# Allegro board beeSafe_1V3.brd
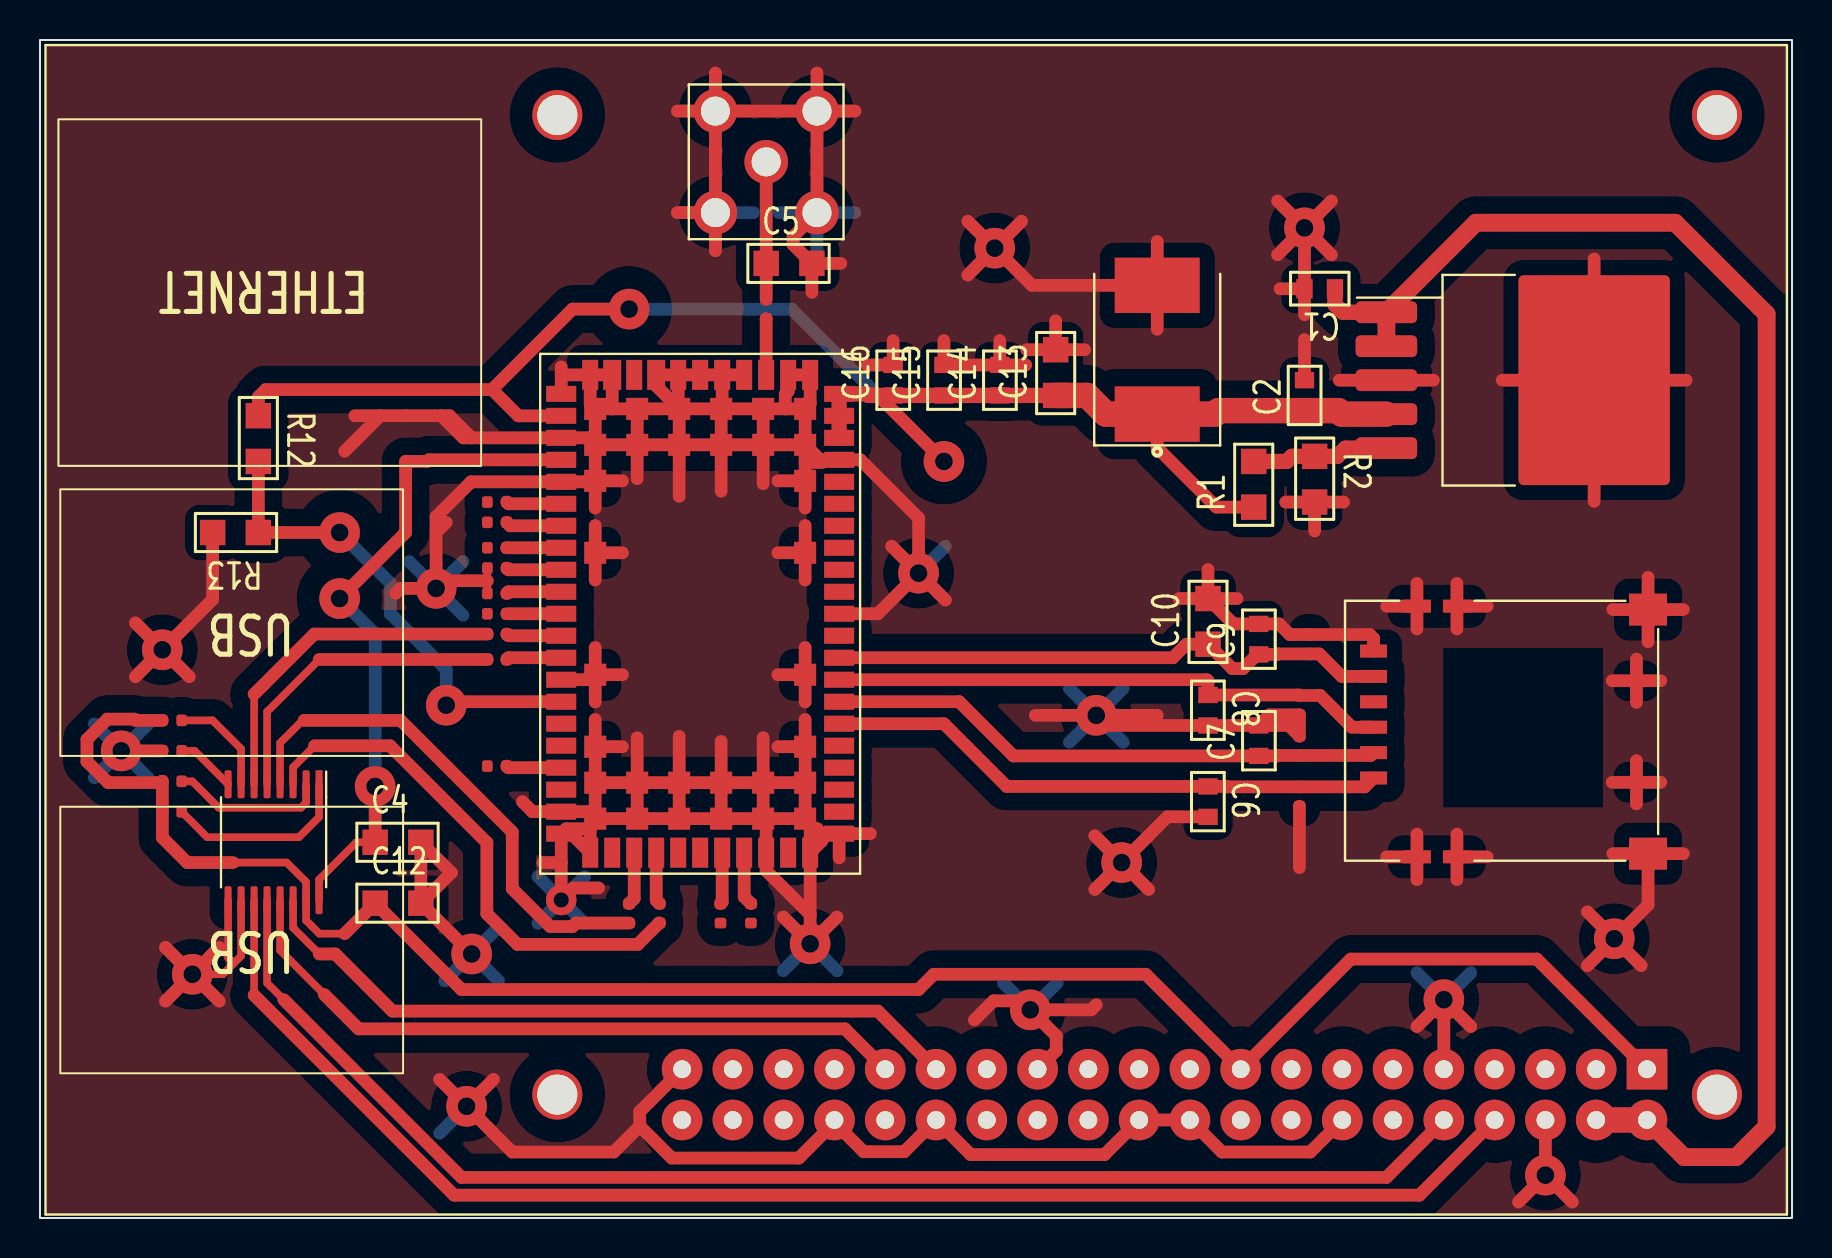
[diagram p0: board, top side]
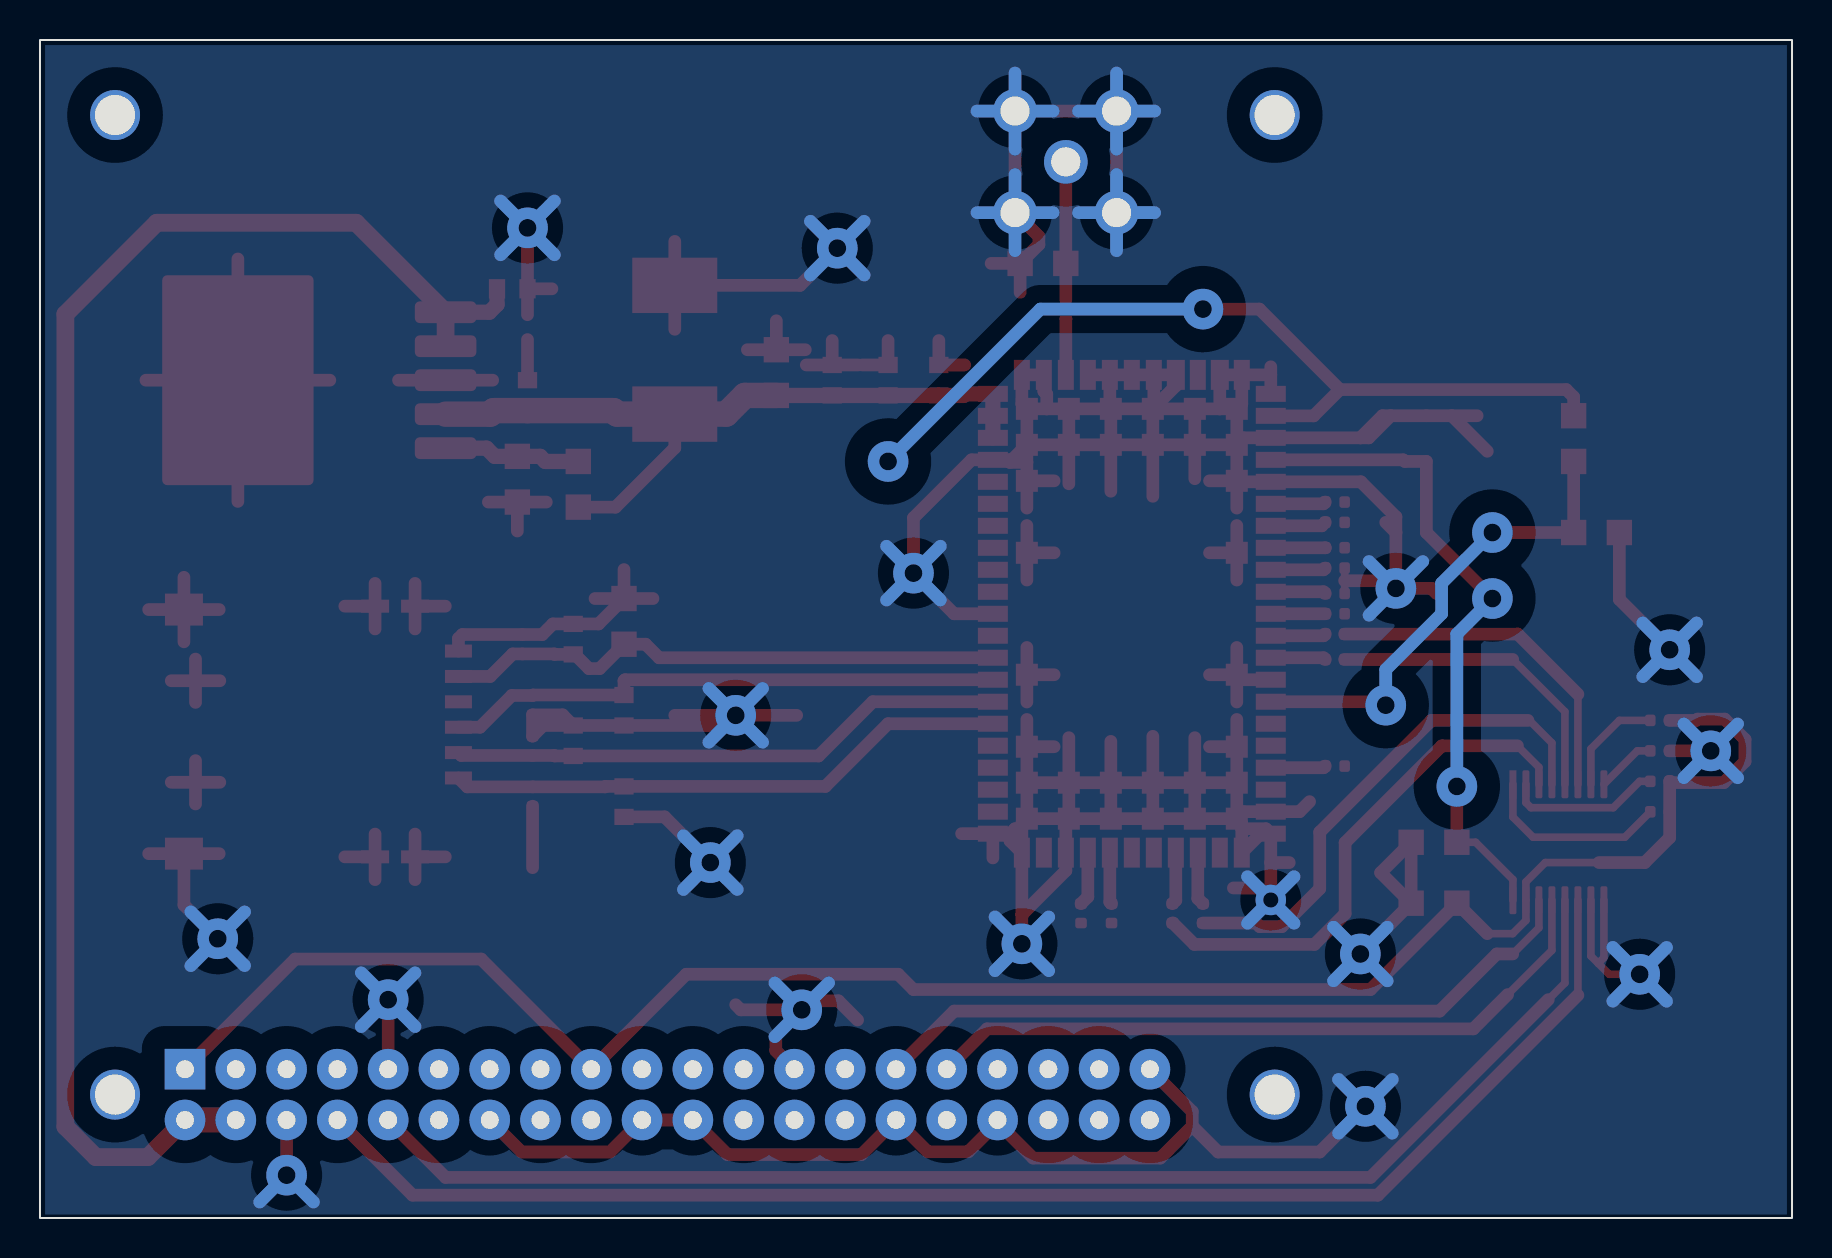
[diagram p1: board, bottom side, seen from below]

Outline 87.63 x 58.93 mm; copper layers: TOP, BOTTOM. Coordinates in mm from the lower left corner of the outline.
Outline path: rectangle 0,0 87.63,58.93

## Design rules (mm)
constraint set DEFAULT: min track width 0.635

## Placement (name value [footprint] x y rotation side)
C1  10u  [GU-C0603]  64.77 46.48 180 top
C2  10u  [GU-C0603]  63.25 40.39 90 top
C4  100n  [GU-C0805]  16.76 18.8 0 top
C5  NC  [GU-C0805]  36.32 47.75 0 top
C6  47p  [GU-C0603]  58.42 21.59 270 top
C7  47p  [GU-C0603]  60.96 23.11 90 top
C8  47p  [GU-C0603]  58.42 26.16 270 top
C9  47p  [GU-C0603]  60.96 28.19 90 top
C10  100n  [GU-C0805]  58.42 28.7 90 top
C12  100n  [GU-C0805]  16.76 15.75 0 top
C13  100n  [GU-C0805]  50.8 41.15 90 top
C14  10n  [GU-C0603]  48.01 41.15 90 top
C15  15p  [GU-C0603]  45.21 41.15 90 top
C16  56p  [GU-C0603]  42.67 41.15 90 top
C17  300u  [GU-C2917]  55.88 43.43 90 top
D2  ESD  [GU-R0402]  63.5 28.7 90 top
D3  ESD  [GU-R0402]  62.99 25.65 270 top
D4  ESD  [GU-R0402]  62.99 23.62 90 top
D5  ESD  [GU-R0402]  62.99 21.08 270 top
J2  SMA_ANT  [GU_SMA_JACK_STR]  36.32 52.83 0 top
J3  SIM_CON  [JAE_SJ115712]  81.28 17.53 90 top
R1  9.1k  [GU-R0805]  60.71 35.56 90 top
R2  3.9k  [GU-R0805]  63.75 38.1 270 top
R3  0  [GU-R0402]  22.86 32.51 0 top
R4  0  [GU-R0402]  22.86 31.24 0 top
R5  0  [GU-R0402]  22.86 30.23 0 top
R6  0  [GU-R0402]  22.86 29.21 0 top
R7  0  [GU-R0402]  22.86 27.94 0 top
R8  0  [GU-R0402]  34.04 15.24 90 top
R9  0  [GU-R0402]  35.56 15.24 90 top
R10  0  [GU-R0402]  29.46 15.24 90 top
R11  0  [GU-R0402]  30.99 15.24 90 top
R12  100k  [GU-R0805]  10.92 40.13 270 top
R13  NC  [GU-R0805]  10.92 34.29 180 top
R14  0  [GU-R0402]  22.86 22.61 0 top
R15  0  [GU-R0402]  36.32 45.47 90 top
R16  0  [GU-R0402]  22.86 33.53 0 top
R17  0  [GU-R0402]  22.86 34.8 0 top
R18  0  [GU-R0402]  22.86 35.81 0 top
R19  0  [GU-R0402]  6.6 20.32 0 top
R20  0  [GU-R0402]  6.6 21.84 0 top
R21  0  [GU-R0402]  6.6 24.89 0 top
R22  0  [GU-R0402]  6.6 23.37 0 top
U1  LT1764AEQ  [DPAK6P170_1404X457L127X83T61-1]  73.66 41.91 270 top
U2  SARA-G3  [UBLOX_SARA-G350-02X-01]  33.02 30.23 270 top
U3  SN74AVC4T774PW  [SOP16P65_500X640X108L60X24]  11.68 18.8 180 top
U4  Raspberry Pi B+  [GU-RASP-PI-3]  87.38 58.67 180 top

## Library data of the parts
C1 C2 C4 C12-C16 = CAP NP
C5-C10 = SMALL CAP
C17 = CAP POL
D2-D5 = ESD
J2 = SMA_ANT
J3 = SIM_CON_0
R1-R14 R16-R18 = R
R15 R19-R22 = SMALL R1
U1 = LT1764AEQ
U2 = SARA-G3
U3 = SN74AVC4T774
U4 = Raspberry Pi B+_2

## Footprints (pads in the part's own frame, mm; a bottom-side part is the same pattern mirrored in y, then rotated)
DPAK6P170_1404X457L127X83T61-1
  rrect 1.09x3.08 smd: 1(-3.4,-6.317) 2(-1.7,-6.317) 3(0,-6.317) 4(1.7,-6.317) 5(3.4,-6.317)
  rrect 10.5x7.57 smd: 6(0,4.072)
GU-C0603
  rect 0.813x0.965 smd: 1(0,0) 2(1.524,0)
GU-C0805
  rect 1.27x1.27 smd: 1(0,0) 2(2.286,0)
GU-C2917
  rect 2.77x4.25 smd: 1(-3.22,0) 2(3.22,0)
GU-R0402
  rrect 0.53x0.58 smd: 1(-0.485,0) 2(0.485,0)
GU-R0805
  rect 1.27x1.27 smd: 1(0,0) 2(2.286,0)
GU-RASP-PI-3
  round 2.5 hole 2 unplated: (3.5,52.5) (3.5,3.5) (61.5,52.5) (61.5,3.5)
  rect 2.032x2.032 hole 0.889: 1(7,51.23)
  round 2.032 hole 0.889: 2(7,53.77) 3(9.54,51.23) 4(9.54,53.77) 5(12.08,51.23) 6(12.08,53.77) 7(14.62,51.23) 8(14.62,53.77) 9(17.16,51.23) 10(17.16,53.77) 11(19.7,51.23) 12(19.7,53.77) 13(22.24,51.23) 14(22.24,53.77) 15(24.78,51.23) 16(24.78,53.77) 17(27.32,51.23) 18(27.32,53.77) 19(29.86,51.23) 20(29.86,53.77) 21(32.4,51.23) 22(32.4,53.77) 23(34.94,51.23) 24(34.94,53.77) 25(37.48,51.23) 26(37.48,53.77) 27(40.02,51.23) 28(40.02,53.77) 29(42.56,51.23) 30(42.56,53.77) 31(45.1,51.23) 32(45.1,53.77) 33(47.64,51.23) 34(47.64,53.77) 35(50.18,51.23) 36(50.18,53.77) 37(52.72,51.23) 38(52.72,53.77) 39(55.26,51.23) 40(55.26,53.77)
GU_SMA_JACK_STR
  round 2.18 hole 1.45: 1(0,0) 2(-2.54,2.54) 3(2.54,2.54) 4(2.54,-2.54) 5(-2.54,-2.54)
JAE_SJ115712
  rect 0.65x1.35 smd: 1(10.835,14.58) 2(9.565,14.58) 3(8.295,14.58) 4(7.025,14.58) 5(5.755,14.58) 6(4.485,14.58)
  rect 0.65x1.4 smd: 7(0.54,10.41) 8(0.54,12.41) 13(13.08,12.41) 14(13.08,10.41)
  rect 1.6x1.9 smd: 9(0.7,0.85) 12(12.91,0.85)
  rect 0.54x0.8 smd: 10(4.27,1.43) 11(9.35,1.43)
SOP16P65_500X640X108L60X24
  rect 0.35x1.4 smd: 1(-2.275,-2.9)
  rrect 0.35x1.4 smd: 2(-1.625,-2.9) 3(-0.975,-2.9) 4(-0.325,-2.9) 5(0.325,-2.9) 6(0.975,-2.9) 7(1.625,-2.9) 8(2.275,-2.9) 9(2.275,2.9) 10(1.625,2.9) 11(0.975,2.9) 12(0.325,2.9) 13(-0.325,2.9) 14(-0.975,2.9) 15(-1.625,2.9) 16(-2.275,2.9)
UBLOX_SARA-G350-02X-01
  rect 0.8x1.5 smd: 1(-11,-6.95) 2(-9.9,-6.95) 3(-8.8,-6.95) 4(-7.7,-6.95) 5(-6.6,-6.95) 6(-5.5,-6.95) 7(-4.4,-6.95) 8(-3.3,-6.95) 9(-2.2,-6.95) 10(-1.1,-6.95) 11(0,-6.95) 12(1.1,-6.95) 13(2.2,-6.95) 14(3.3,-6.95) 15(4.4,-6.95) 16(5.5,-6.95) 17(6.6,-6.95) 18(7.7,-6.95) 19(8.8,-6.95) 20(9.9,-6.95) 21(11,-6.95) 33(11,6.95) 34(9.9,6.95) 35(8.8,6.95) 36(7.7,6.95) 37(6.6,6.95) 38(5.5,6.95) 39(4.4,6.95) 40(3.3,6.95) 41(2.2,6.95) 42(1.1,6.95) 43(0,6.95) 44(-1.1,6.95) 45(-2.2,6.95) 46(-3.3,6.95) 47(-4.4,6.95) 48(-5.5,6.95) 49(-6.6,6.95) 50(-7.7,6.95) 51(-8.8,6.95) 52(-9.9,6.95) 53(-11,6.95)
  rect 1.5x0.8 smd: 22(11.95,-5.5) 23(11.95,-4.4) 24(11.95,-3.3) 25(11.95,-2.2) 26(11.95,-1.1) 27(11.95,0) 28(11.95,1.1) 29(11.95,2.2) 30(11.95,3.3) 31(11.95,4.4) 32(11.95,5.5) 54(-11.95,5.5) 55(-11.95,4.4) 56(-11.95,3.3) 57(-11.95,2.2) 58(-11.95,1.1) 59(-11.95,0) 60(-11.95,-1.1) 62(-11.95,-3.3) 64(-11.95,-5.5)
  rect 1.5x0.9 smd: 61(-11.95,-2.2) 63(-11.95,-4.4)
  rect 1.1x1.1 smd: 65(-10.25,-5.25) 66(-10.25,-3.15) 67(-10.25,-1.05) 68(-10.25,1.05) 69(-10.25,3.15) 70(-10.25,5.25) 71(-8.45,-5.25) 72(-8.45,-3.15) 73(-8.45,-1.05) 74(-8.45,1.05) 75(-8.45,3.15) 76(-8.45,5.25) 77(-6.65,-5.25) 78(-6.65,5.25) 79(-3.05,-5.25) 80(-3.05,5.25) 81(3.05,-5.25) 82(3.05,5.25) 83(6.65,-5.25) 84(6.65,5.25) 85(8.45,-5.25) 86(8.45,-3.15) 87(8.45,-1.05) 88(8.45,1.05) 89(8.45,3.15) 90(8.45,5.25) 91(10.25,-5.25) 92(10.25,-3.15) 93(10.25,-1.05) 94(10.25,1.05) 95(10.25,3.15) 96(10.25,5.25)

## Nets
3V8: C2.1 C13.1 C14.1 C15.1 C16.1 C17.1 R1.1 R12.1 U1.4 U2.2 U2.51 U2.52 U2.53
5V: C1.1 U1.1 U1.2 U4.2 U4.4(P5V#4)
GND: C1.2 C2.2 C4.2 C5.2 C6.2 C7.2 C8.2 C9.2 C10.2 C12.2 C13.2 C14.2 C15.2 C16.2 C17.2 D2.2 D3.2 D4.2 D5.2 J2.2 J2.3 J2.4 J2.5(GND4) J3.1 J3.7 J3.8 J3.9 J3.10 J3.11 J3.12 J3.13 J3.14 R2.2 R3.1 R4.1 R13.2 R22.1 U1.3 U1.6 U2.1 U2.3 U2.5 U2.14 U2.20 U2.21 U2.22 U2.30 U2.32 U2.33 U2.43 U2.50 U2.54 U2.55 U2.57 U2.58 U2.59 U2.60 U2.61 U2.63 U2.64 U2.65 U2.66 U2.67 U2.68 U2.69 U2.70 U2.71 U2.72 U2.73 U2.74 U2.75 U2.76 U2.77 U2.78 U2.79 U2.80 U2.81 U2.82 U2.83 U2.84 U2.85 U2.86 U2.87 U2.88 U2.89 U2.90 U2.91 U2.92 U2.93 U2.94 U2.95 U2.96 U3.9(~OE) U3.10 U4.6 U4.9 U4.14 U4.20 U4.22 U4.25 U4.30 U4.34 U4.39
PI_GPIO5: U3.14 U4.29
PI_GPIO6: U3.13 U4.31
PI_RX: U3.12 U4.10
PI_TX: U3.11 U4.8
PWR_ON: R12.2 R13.1 U2.15
SARA_GPIO3: R10.1 U3.4
SARA_GPIO4: R11.1 U3.3
SARA_RX: R7.1 U3.5
SARA_TX: R6.1 U3.6
SIM_CLK: C6.1 D5.1(2) J3.6 U2.38
SIM_IO: C7.1 D4.1(2) J3.5 U2.39
SIM_RST: C8.1 D3.1(2) J3.4 U2.40
V_INT: C4.1 U2.4(V_INT) U3.16
V_PI: C12.1 R19.1 R20.1 R21.1 U3.15 U4.1 U4.17
VSIM: C9.1 C10.1 D2.1(2) J3.2 U2.41
N24064: R15.1 U2.56
N24073: C5.1 J2.1 R15.2
N39174: R1.2 R2.1 U1.5(SENSE)
N664261: R3.2 U2.9
N664661: R7.2 U2.13
N664861: R16.2 U2.8
N665261: R14.2 U2.18
N665461: R5.2 U2.11
N665861: R17.2 U2.7
N666061: R19.2 U3.1
N666461: R10.2 U2.24
N666661: R8.2 U2.28
N667709: R20.2 U3.2
N668381: R18.2 U2.6
N668781: R4.2 U2.10
N669181: R11.2 U2.25
N669781: R9.2 U2.29
N6677010: R21.2 U3.7
N6677011: R22.2 U3.8
N6719611: R6.2 U2.12

Pads without a net: J3 3; R5 1; R8 1; R9 1; R14 1; R16 1; R17 1; R18 1; U2 16 17 19 23 26 27 31 34 35 36 37 42 44 45 46 47 48 49 62; U4 3 5 7 11 12 13 15 16 18 19 21 23 24 26 27 28 32 33 35 36 37 38 40

## Via types
v1: diameter 2.032, hole 0.889, TOP to BOTTOM, 22 vias
v2: diameter 1.524, hole 0.76, TOP to BOTTOM, 1 via

## Routing (per net, layer and track width the routed paths; a pad name or vN(x,y) marks a point on that pad's centre or on a via; arc(x,y) is an arc through that point)
3V8: length 88.7
  TOP w0.635: R1.1 58.84,35.56 55.88,38.52 C17.1 ; R12.1 10.92,41.07 11.29,41.44 22.61,41.44 ; U2.53 41.83,41.23 v1(45.21,37.85) ; 22.61,41.44 23.93,40.13 U2.2 ; 22.61,41.44 26.64,45.47 v1(29.46,45.47)
  TOP w0.762: C13.1 C14.1 C15.1 C16.1 41.43,41.15 41.35,41.23 U2.53 U2.52 U2.51
  TOP w1.27: C13.1 52.38,41.15 53.31,40.21 C17.1 58.77,40.21 58.94,40.39 C2.1 64.94,40.39 65.11,40.21 U1.4
  BOTTOM w0.635: v1(45.21,37.85) 37.59,45.47 v1(29.46,45.47)
5V: length 78.5
  TOP w0.762: C1.1 64.77,45.69 65.15,45.31 U1.1
  TOP w0.889: U4.2 82.23,3.05 84.84,3.05 86.36,4.57 86.36,45.21 81.79,49.78 71.82,49.78 U1.1 U1.2
  TOP w1.27: U4.4 U4.2
GND: length 712.5
  TOP w0.381: 9.69,12.74 9.14,12.19 v1(7.62,12.19) ; 9.69,12.74 9.41,13.02 U3.9 ; 9.69,12.74 10.06,13.11 U3.10 ; R3.1 R4.1
  TOP w0.635: 28.62,40.48 U2.63 U2.64 ; 28.62,40.48 U2.65 ; 28.62,40.48 U2.66 ; U2.84 38.27,24.94 ; U2.84 36.91,23.58 ; U2.84 U2.90 ; 45.21,43.89 C15.2 46.51,42.67 ; 69.7,41.91 U1.3 64.99,41.91 ; J3.10 81.06,21.8 ; J3.10 79.85,20.71 ; J3.10 79.85,22.88 ; J3.10 78.64,21.8 ; 36.91,33.28 U2.80 ; U2.80 38.27,31.91 ; U2.80 38.27,34.64 ; v1(78.74,13.97) 80.43,15.66 J3.9 ; v1(78.74,13.97) 77.4,15.31 ; v1(78.74,13.97) 80.08,12.63 ; v1(78.74,13.97) 77.4,12.63 ; U2.95 36.32,19.83 U2.30 36.32,17.38 38.52,15.18 ; U2.95 U2.96 ; U2.95 U2.89 ; U2.95 U2.94 ; C14.2 48.01,43.89 ; C14.2 46.71,42.67 ; C14.2 49.3,42.67 ; 30,4.6 30,5.33 U4.39 ; 30,4.6 28.7,3.3 23.62,3.3 v1(21.34,5.59) ; 30,4.6 31.6,3 37.96,3 39.74,4.78 ; v1(49.53,10.41) 50.83,9.11 50.83,8.38 U4.25 ; v1(49.53,10.41) 52.58,10.41 52.83,10.67 ; v1(49.53,10.41) 49.08,10.86 47.69,10.86 46.74,9.91 ; U2.87 U2.93 ; U2.87 U2.86 ; U2.87 31.97,24.1 ; U2.87 U2.88 ; U2.93 U2.92 ; U2.93 U2.94 ; U2.90 U2.96 ; U2.90 U2.89 ; U2.96 38.52,19.73 38.52,19.47 ; 19.99,6.93 v1(21.34,5.59) ; v1(21.34,5.59) 22.68,6.93 ; 17.02,40.13 20.07,40.13 ; 17.02,40.13 15.24,38.35 ; 17.02,40.13 15.75,40.13 ; J3.14 70.87,31.74 ; J3.14 70.87,29.47 ; J3.14 72.38,30.61 ; 67.36,18.07 J3.8 ; J3.8 68.87,19.2 ; J3.8 68.87,16.93 ; U2.69 37.28,40.48 ; U2.69 U2.75 ; U2.69 U2.68 ; 37.28,40.48 U2.70 ; 37.28,40.48 37.28,41.21 37.42,41.35 U2.55 U2.54 38.52,40.73 U2.70 ; 27.52,19.47 U2.22 26.57,19.23 U2.21 ; 27.52,19.47 27.52,19.73 U2.91 ; 27.52,19.47 26.31,19.47 U2.21 ; U2.79 29.13,33.28 ; U2.79 27.77,31.91 ; U2.79 27.77,34.64 ; U2.74 U2.73 ; U2.74 34.07,36.36 ; U2.74 U2.75 ; U2.74 U2.68 ; U2.73 U2.72 ; U2.73 31.97,36.1 ; U2.73 U2.67 ; 39.11,19.23 39.11,18.87 U2.32 ; 39.11,19.23 38.87,19.47 38.52,19.47 ; 39.11,19.23 U2.33 ; 38.27,37.8 U2.76 ; 38.27,37.8 U2.78 ; 38.27,37.8 39.12,37.8 39.12,37.93 ; U2.76 39.02,37.93 39.12,37.93 ; U2.76 U2.75 ; U2.76 U2.70 ; 38.52,19.47 U2.32 ; v1(52.83,25.15) 53.34,24.64 C8.2 C7.2 ; v1(52.83,25.15) 55.88,25.15 ; v1(52.83,25.15) 49.78,25.15 ; U2.77 29.13,36.88 ; U2.77 27.72,36.83 U2.5 21.56,36.83 19.81,35.08 19.81,34.29 ; U2.77 27.77,35.51 ; U2.77 U2.71 ; 68.87,29.47 J3.13 ; J3.13 68.87,31.74 ; J3.13 67.36,30.61 ; 20.07,40.13 20.48,40.13 21.59,39.03 ; 20.07,40.13 21.17,39.03 21.59,39.03 ; U2.32 38.52,15.18 ; C12.2 v1(21.59,13.21) ; C12.2 20.57,17.27 C4.2 C12.2 ; 6.28,13.54 v1(7.62,12.19) ; v1(7.62,12.19) 8.96,10.85 ; v1(7.62,12.19) 8.96,13.54 ; v1(7.62,12.19) 6.28,10.85 ; U2.86 U2.85 ; U2.86 29.87,24.03 ; U2.86 U2.92 ; U2.85 U2.83 ; U2.85 U2.91 ; C7.2 61.49,25.17 D3.2 D4.2 62.46,24.64 C7.2 ; U4.6 v1(75.3,2.14) ; v1(75.3,2.14) 73.95,0.8 ; v1(75.3,2.14) 76.64,0.8 ; 36.91,27.18 U2.82 ; U2.82 38.27,25.81 ; U2.82 38.27,28.54 ; 39.12,37.93 U2.50 41.04,37.93 43.94,35.02 v1(43.94,32.26) ; 78.67,18.23 J3.9 ; J3.9 82.19,18.23 ; U2.60 U2.61 30.82,41.63 U2.67 ; U2.60 U2.59 U2.58 ; U2.60 31.92,40.53 U2.67 ; C13.2 50.8,44.88 ; C13.2 52.25,43.43 ; C13.2 49.35,43.43 ; 39.74,4.78 41.2,3.32 43.23,3.32 U4.30 46.55,3.17 53.25,3.17 U4.22 U4.20 59.12,3.3 63.53,3.3 U4.14 ; 39.74,4.78 U4.34 ; U2.71 U2.65 ; U2.71 U2.72 ; U2.71 27.42,39.03 U2.3 21.59,39.03 ; U2.65 27.52,40.73 U2.64 ; 73.13,41.91 U1.6 ; U1.6 77.73,47.97 ; U1.6 77.73,35.85 ; U1.6 82.33,41.91 ; C17.2 49.61,46.65 v1(47.75,48.51) ; C17.2 55.88,44.46 ; C17.2 55.88,48.85 ; J2.3 38.86,57.28 ; J2.3 40.77,55.37 ; J2.3 J2.2 ; J2.3 J2.4 37.67,49.1 37.67,48.69 C5.2 ; U2.89 36.17,24.03 ; U2.89 U2.88 ; 24.13,20.83 24.63,20.33 U2.20 27.42,20.33 U2.91 ; 68.87,9.58 v1(70.22,10.92) ; v1(70.22,10.92) 71.56,9.58 ; v1(70.22,10.92) U4.9 ; v1(47.75,48.51) 49.1,49.86 ; v1(47.75,48.51) 46.41,49.86 ; v1(47.75,48.51) 46.41,47.17 ; 33.78,48.39 J2.5 ; J2.5 J2.2 ; J2.5 31.88,50.29 ; v1(38.52,13.72) 39.86,15.06 ; v1(38.52,13.72) 37.18,15.06 ; v1(38.52,13.72) 38.52,15.18 ; v1(43.94,32.26) 45.29,30.91 ; v1(43.94,32.26) 42.6,33.6 ; v1(43.94,32.26) 41.91,30.23 U2.43 ; U2.91 U2.92 ; 4.77,29.77 v1(6.12,28.42) ; v1(6.12,28.42) 8.64,30.94 R13.2 ; v1(6.12,28.42) 7.46,27.08 ; v1(6.12,28.42) 4.77,27.08 ; 26.07,42.18 26.07,42.58 ; 26.07,42.18 U2.64 ; 26.07,42.18 U2.1 ; v1(63.25,49.53) 64.59,48.19 ; v1(63.25,49.53) 61.9,50.87 ; v1(63.25,49.53) 61.9,48.19 ; v1(63.25,49.53) C1.2 ; v1(63.25,49.53) 64.59,50.87 ; J3.1 66.7,28.99 66.5,29.19 D2.2 62.51,29.19 61.98,29.72 C9.2 59.69,29.72 C10.2 ; U2.75 36.17,36.73 ; U2.78 38.27,35.51 ; U2.78 36.91,36.88 ; U2.67 U2.66 ; U2.67 U2.68 ; 26.07,17.78 v2(26.07,15.91) 26.67,16.51 27.94,16.51 ; 26.07,17.78 U2.21 ; 26.07,17.78 25.15,17.78 ; U2.83 29.13,23.58 ; U2.83 27.77,24.94 ; 79.85,25.79 J3.11 ; J3.11 81.06,26.88 ; J3.11 79.85,27.96 ; J3.11 78.64,26.88 ; C10.2 59.87,30.99 ; C10.2 58.42,32.44 ; C10.2 56.97,30.99 ; 80.43,28.82 J3.12 ; J3.12 82.19,30.44 ; J3.12 78.67,30.44 ; J3.12 80.43,32.05 ; U2.14 27.52,26.93 U2.81 ; U2.81 27.77,28.54 ; U2.81 27.77,25.81 ; U2.81 29.13,27.18 ; D5.2 62.99,17.53 ; J2.2 31.88,55.37 ; J2.2 33.78,57.28 ; U2.72 29.87,36.98 ; U2.72 U2.66 ; 42.67,43.89 C16.2 41.38,42.67 ; U2.88 34.07,23.84 ; U2.88 U2.94 ; 63.75,34.37 R2.2 ; R2.2 65.2,35.81 ; R2.2 62.31,35.81 ; U2.57 U2.58 ; U2.58 34.12,40.53 U2.68 ; 52.76,19.12 v1(54.1,17.78) ; v1(54.1,17.78) 52.76,16.44 ; v1(54.1,17.78) 56.39,20.07 C6.2 ; v1(54.1,17.78) 55.45,16.44 ; U2.33 41.53,19.23 ; U2.33 39.97,18.01 ; 38.61,46.3 C5.2 ; C5.2 40.06,47.75 ; v1(19.81,31.5) 19.81,34.29 ; v1(19.81,31.5) 18.03,31.5 17.78,31.24 ; v1(19.81,31.5) 20.19,31.88 22.38,31.88 ; 19.81,34.29 20.32,34.8 ; 62.03,46.48 C1.2 ; C1.2 63.25,45.19 ; J3.7 70.87,19.2 ; J3.7 70.87,16.93 ; J3.7 72.38,18.07 ; C2.2 63.25,43.94 ; R22.1 v1(4.06,23.37)
  BOTTOM w0.635: v1(4.06,23.37) 5.41,22.02 ; v1(4.06,23.37) 5.41,24.71 ; v1(4.06,23.37) 2.72,24.71 ; v1(4.06,23.37) 2.72,22.02 ; v1(70.22,10.92) 71.56,9.58 ; v1(70.22,10.92) 71.56,12.27 ; v1(70.22,10.92) 68.87,12.27 ; v1(70.22,10.92) 68.87,9.58 ; J2.3 40.77,55.37 ; J2.3 36.96,55.37 ; J2.3 38.86,57.28 ; J2.3 38.86,53.47 ; 52.76,19.12 v1(54.1,17.78) ; v1(54.1,17.78) 55.45,19.12 ; v1(54.1,17.78) 52.76,16.44 ; v1(54.1,17.78) 55.45,16.44 ; 6.28,13.54 v1(7.62,12.19) ; v1(7.62,12.19) 8.96,10.85 ; v1(7.62,12.19) 6.28,10.85 ; v1(7.62,12.19) 8.96,13.54 ; v1(63.25,49.53) 64.59,50.87 ; v1(63.25,49.53) 64.59,48.19 ; v1(63.25,49.53) 61.9,50.87 ; v1(63.25,49.53) 61.9,48.19 ; v1(52.83,25.15) 54.18,23.8 ; v1(52.83,25.15) 51.49,23.8 ; v1(52.83,25.15) 51.49,26.49 ; v1(52.83,25.15) 54.18,26.49 ; v1(43.94,32.26) 45.29,33.6 ; v1(43.94,32.26) 45.29,30.91 ; v1(43.94,32.26) 42.6,33.6 ; v1(43.94,32.26) 42.6,30.91 ; 18.47,32.84 v1(19.81,31.5) ; v1(19.81,31.5) 21.16,30.15 ; v1(19.81,31.5) 21.16,32.84 ; J2.5 35.69,50.29 ; J2.5 33.78,52.2 ; J2.5 33.78,48.39 ; J2.5 31.88,50.29 ; v1(21.59,13.21) 22.93,11.86 ; v1(21.59,13.21) 20.25,11.86 ; v1(21.59,13.21) 20.25,14.55 ; v1(21.59,13.21) 22.93,14.55 ; 37.18,12.37 v1(38.52,13.72) ; v1(38.52,13.72) 37.18,15.06 ; v1(38.52,13.72) 39.86,12.37 ; v1(38.52,13.72) 39.86,15.06 ; 46.41,47.17 v1(47.75,48.51) ; v1(47.75,48.51) 49.1,47.17 ; v1(47.75,48.51) 46.41,49.86 ; v1(47.75,48.51) 49.1,49.86 ; v1(6.12,28.42) 7.46,27.08 ; v1(6.12,28.42) 4.77,29.77 ; v1(6.12,28.42) 4.77,27.08 ; v1(6.12,28.42) 7.46,29.77 ; J2.2 35.69,55.37 ; J2.2 31.88,55.37 ; J2.2 33.78,53.47 ; J2.2 33.78,57.28 ; v2(26.07,15.91) 27.23,17.07 ; v2(26.07,15.91) 24.91,14.75 ; v2(26.07,15.91) 24.91,17.07 ; v2(26.07,15.91) 27.23,14.75 ; v1(49.53,10.41) 50.87,11.76 ; v1(49.53,10.41) 48.19,11.76 ; v1(49.53,10.41) 50.87,9.07 ; 19.99,4.24 v1(21.34,5.59) ; v1(21.34,5.59) 22.68,6.93 ; v1(21.34,5.59) 22.68,4.24 ; v1(21.34,5.59) 19.99,6.93 ; 38.86,48.39 J2.4 ; J2.4 40.77,50.29 ; J2.4 38.86,52.2 ; J2.4 36.96,50.29 ; 77.4,12.63 v1(78.74,13.97) ; v1(78.74,13.97) 80.08,12.63 ; v1(78.74,13.97) 77.4,15.31 ; v1(78.74,13.97) 80.08,15.31 ; 73.95,0.8 v1(75.3,2.14) 76.64,0.8
PI_GPIO5: length 36.5
  TOP w0.381: U3.14 12.66,14.52 13.97,13.21
  TOP w0.635: U4.29 41.91,10.35 17.63,10.35 14.77,13.21 13.97,13.21
PI_GPIO6: length 35.2
  TOP w0.381: 14.22,11.18 12.01,13.39 U3.13
  TOP w0.635: 14.22,11.18 15.94,9.46 40.26,9.46 U4.31
PI_RX: length 68.2
  TOP w0.381: U3.12 11.36,11.76 12.19,10.92
  TOP w0.635: U4.10 67.34,2.03 21.08,2.03 12.19,10.92
PI_TX: length 72.5
  TOP w0.381: U3.11 10.71,11.15
  TOP w0.635: U4.8 69,1.14 20.71,1.14 10.71,11.15
PWR_ON: length 24.3
  TOP w0.635: v1(14.99,34.29) R13.1 R12.2 ; U2.15 20.49,25.83 v1(20.32,25.65)
  BOTTOM w0.635: v1(14.99,34.29) 17.53,31.75 17.53,30.23 20.32,27.43 v1(20.32,25.65)
SARA_GPIO3: length 26
  TOP w0.381: 13.21,24.89 13.14,24.89 12.01,23.76 U3.4
  TOP w0.635: R10.1 26.8,14.76 26.62,14.58 25.52,14.58 23.62,16.47 23.62,19.3 18.03,24.89 13.21,24.89
SARA_GPIO4: length 26.3
  TOP w0.381: 13.73,23.62 12.66,22.55 U3.3
  TOP w0.635: R11.1 30.96,14.76 29.9,13.69 23.89,13.69 22.35,15.22 22.35,18.78 17.51,23.62 13.73,23.62
SARA_RX: length 15.7
  TOP w0.381: 13.97,27.94 11.36,25.33 U3.5
  TOP w0.635: 13.97,27.94 R7.1
SARA_TX: length 17.4
  TOP w0.381: 10.71,26.2 U3.6
  TOP w0.635: 10.71,26.2 13.72,29.21 R6.1
SIM_CLK: length 28.2
  TOP w0.635: U2.38 45.21,24.73 48.35,21.59 C6.1 59.35,21.59 59.37,21.57 D5.1 66.26,21.57 J3.6
SIM_IO: length 27.9
  TOP w0.635: U2.39 45.97,25.83 48.69,23.11 C7.1 61.89,23.11 61.91,23.14 D4.1 66.56,23.14 J3.5
SIM_RST: length 28.1
  TOP w0.635: J3.4 65.62,24.55 64.03,26.14 D3.1 62.97,26.16 C8.1 58.42,26.87 58.37,26.93 U2.40
V_INT: length 33.6
  TOP w0.381: U3.16 13.96,16.93 15.82,18.8 C4.1
  TOP w0.635: C4.1 v1(16.76,21.59) ; U2.4 19.45,37.93 19.37,37.85 18.29,37.85 18.29,34.29 v1(14.99,30.99)
  BOTTOM w0.635: v1(14.99,30.99) 16.76,29.21 v1(16.76,21.59)
V_PI: length 99
  TOP w0.381: 9.65,17.78 12.34,17.78 13.31,16.81 U3.15 13.31,14.88 13.97,14.22 15.24,14.22
  TOP w0.635: 15.24,14.22 C12.1 21.08,11.43 43.94,11.43 44.7,12.19 55.31,12.19 U4.17 65.57,12.95 74.87,12.95 U4.1 ; R21.1 4.79,24.89 4.72,24.96 3.37,24.96 2.35,23.94 2.35,22.84 3.41,21.78 6.06,21.78 R20.1 R19.1 6.12,19.03 7.37,17.78 9.65,17.78
VSIM: length 28.3
  TOP w0.635: U2.41 56.66,28.03 57.34,28.7 C10.1 59.64,27.48 60.17,27.48 60.88,28.19 C9.1 61.89,28.19 61.91,28.22 D2.1 63.98,28.22 65.11,27.09 J3.2
N24064: length 2.8
  TOP w0.635: R15.1 36.32,44.98 U2.56
N24073: length 6.9
  TOP w0.635: J2.1 C5.1 R15.2
N39174: length 6.9
  TOP w0.762: R1.2 62.36,37.85 62.61,38.1 R2.1 64.88,38.1 65.29,38.51 U1.5
N664261: length 2.8
  TOP w0.635: U2.9 23.43,32.43 R3.2
N664661: length 2.8
  TOP w0.635: U2.13 23.43,28.03 R7.2
N664861: length 2.7
  TOP w0.635: U2.8 23.35,33.53 R16.2
N665261: length 2.8
  TOP w0.635: R14.2 23.42,22.53 U2.18
N665461: length 2.7
  TOP w0.635: U2.11 R5.2
N665861: length 2.8
  TOP w0.635: U2.7 23.52,34.63 R17.2
N666061: length 9.5
  TOP w0.381: U3.1 13.96,20.06 12.95,19.05 8.36,19.05 R19.2
N666461: length 2.7
  TOP w0.635: U2.24 29.72,15.98 R10.2
N666661: length 2.6
  TOP w0.635: R8.2 34.12,15.81 U2.28
N667709: length 7.8
  TOP w0.381: R20.2 7.62,21.84 8.94,20.53 13.06,20.53 13.31,20.78 U3.2
N668381: length 2.8
  TOP w0.635: U2.6 23.43,35.73 R18.2
N668781: length 2.8
  TOP w0.635: R4.2 23.43,31.33 U2.10
N669181: length 2.6
  TOP w0.635: R11.2 30.82,15.89 U2.25
N669781: length 2.7
  TOP w0.635: U2.29 35.22,16.06 R9.2
N6677010: length 5.3
  TOP w0.381: R21.2 8.64,24.89 10.06,23.47 U3.7
N6677011: length 3
  TOP w0.381: U3.8 7.74,23.37 R22.2
N6719611: length 2.8
  TOP w0.635: R6.2 23.43,29.13 U2.12

## Copper pours and planes (outline as drawn; the poured copper is in the pictures)
GND on TOP: 0.25,58.67 87.38,58.67 87.38,0.17 0.25,0.17 ; 5 cut-outs
GND on TOP: 0.25,58.67 87.38,58.67 87.38,0.17 0.25,0.17 ; 5 cut-outs
GND on TOP: 0.25,58.67 87.38,58.67 87.38,0.17 0.25,0.17 ; 4 cut-outs
GND on BOTTOM: 0.25,58.67 87.38,58.67 87.38,0.17 0.25,0.17
